# Altium PCB PenguinCrust.PcbDoc
Units mm, origin at the board's own origin, x right, y up, seen from the top; angles counter-clockwise.
Board outline 65 x 56 mm, 2 copper layers (Top Layer, Bottom Layer); 68 components, 89 nets, 344 pads, 42 vias.
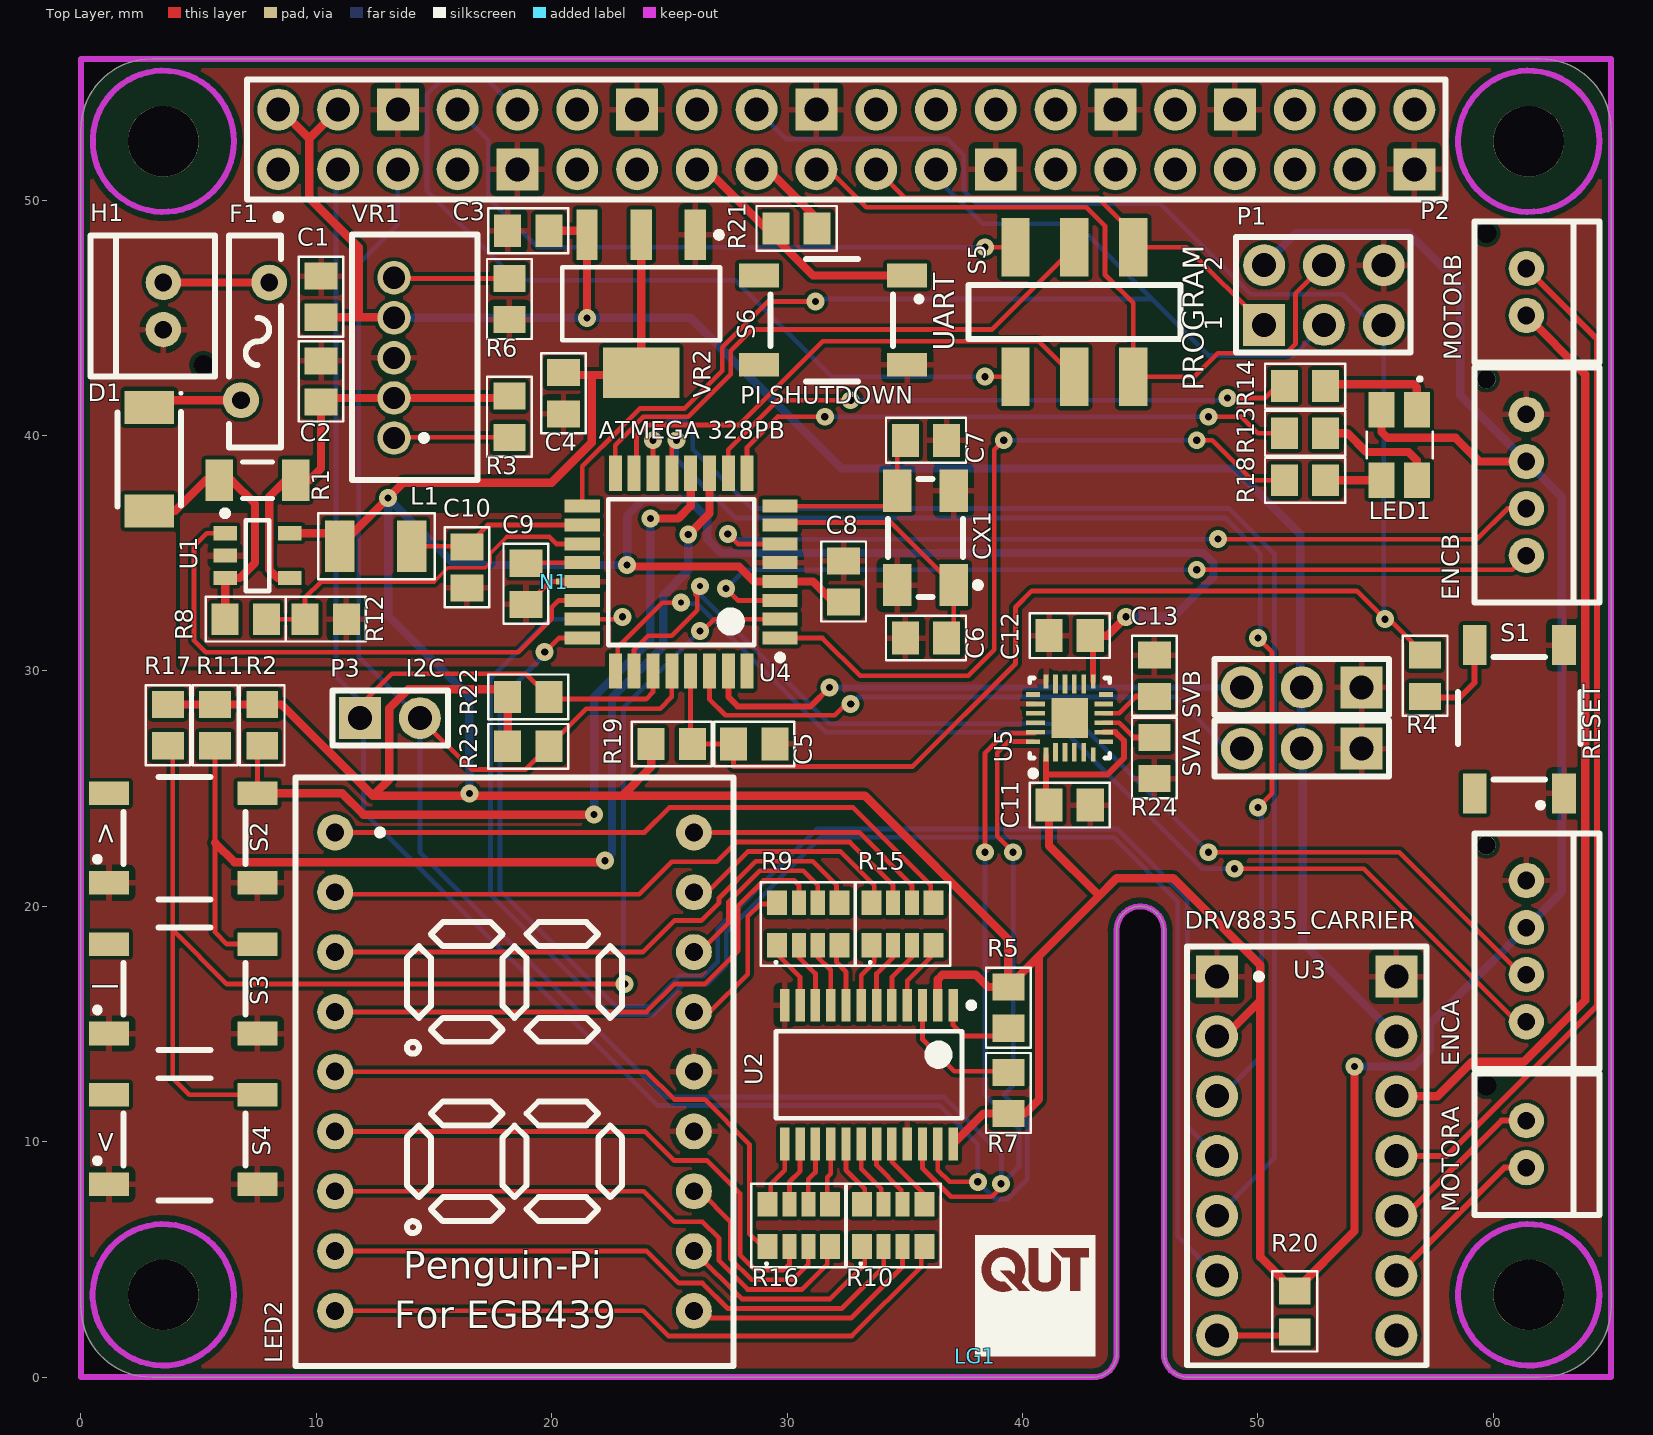
[diagram p0: Top Layer view]
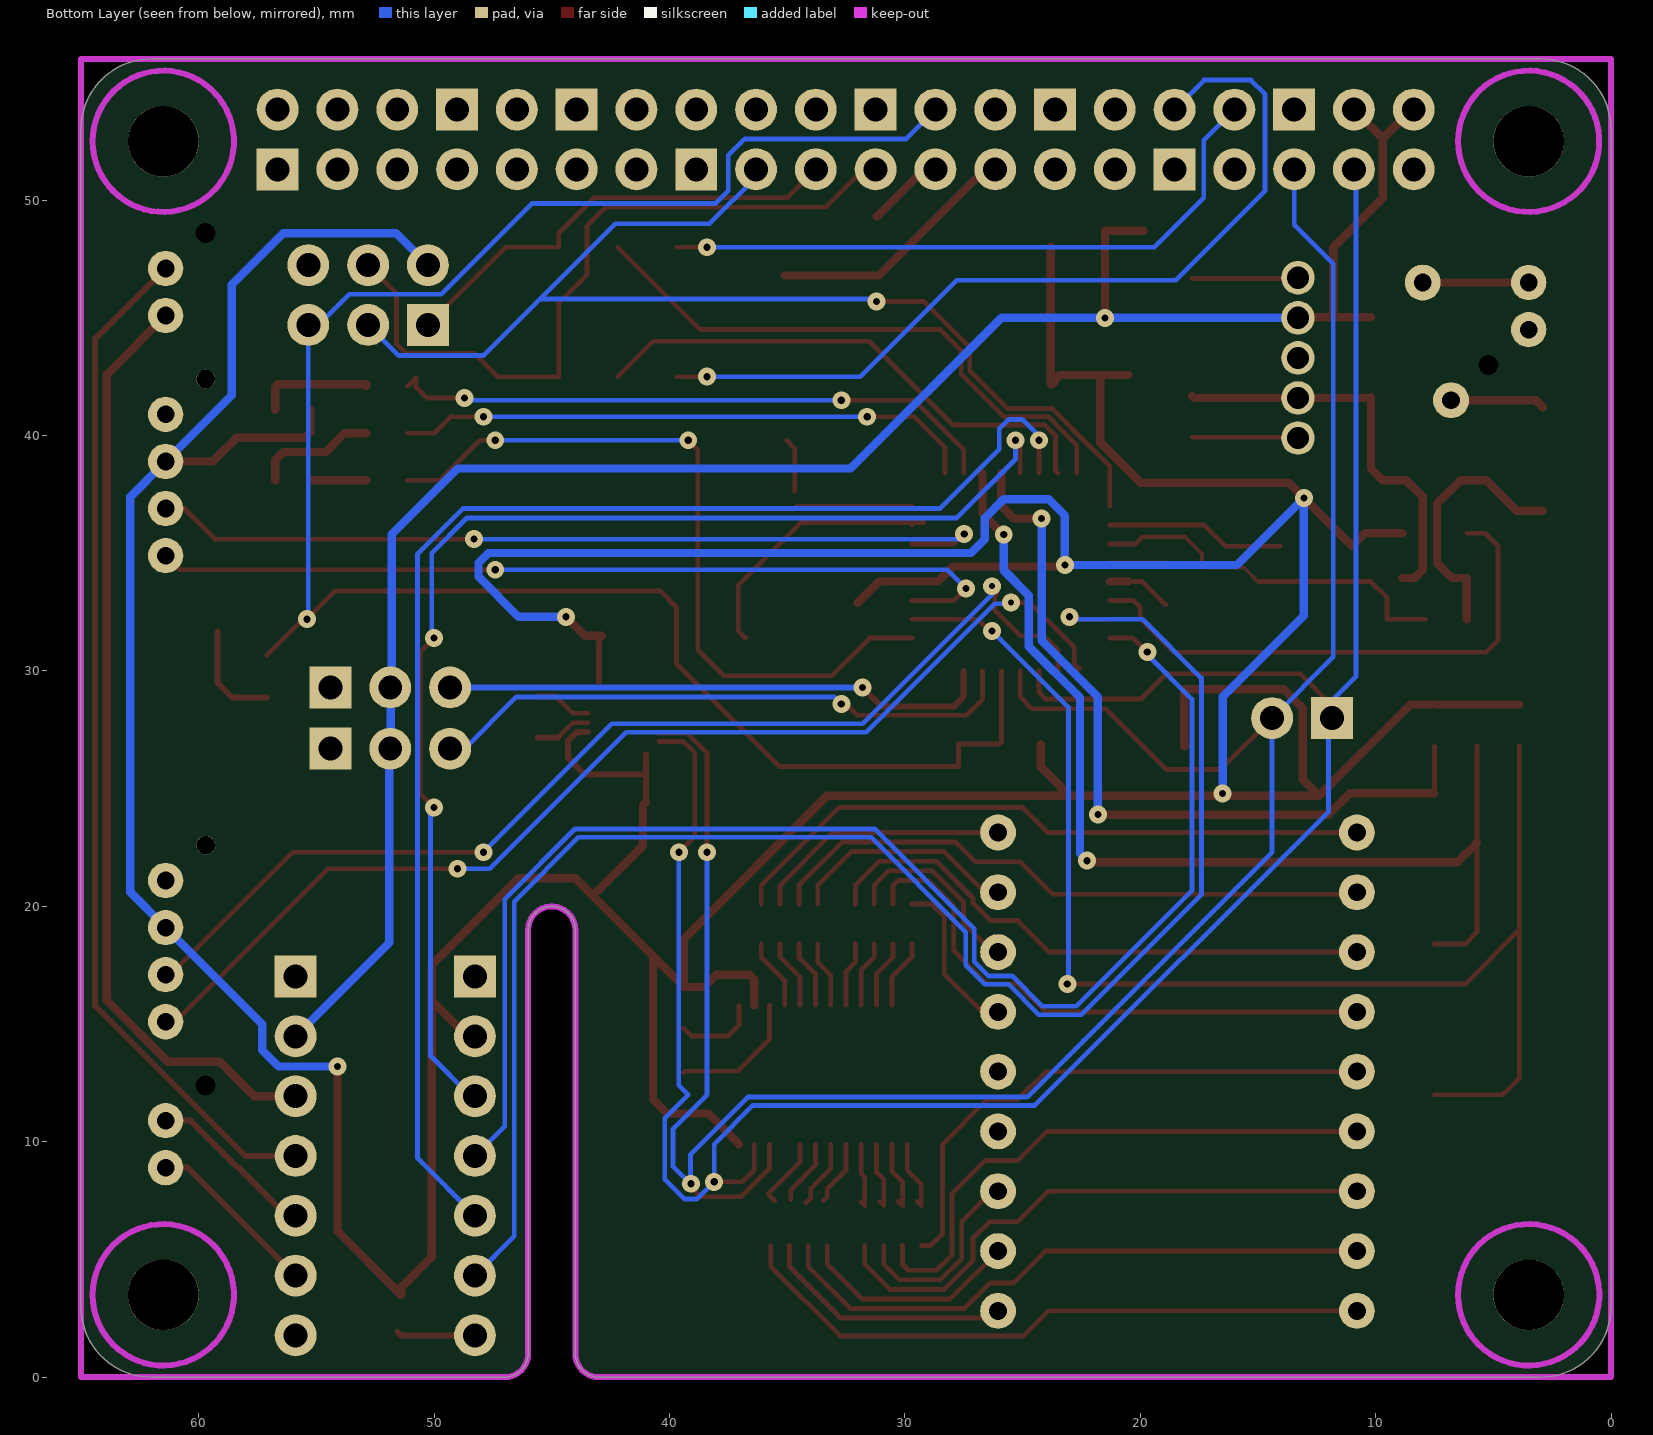
[diagram p1: Bottom Layer view, seen from below]
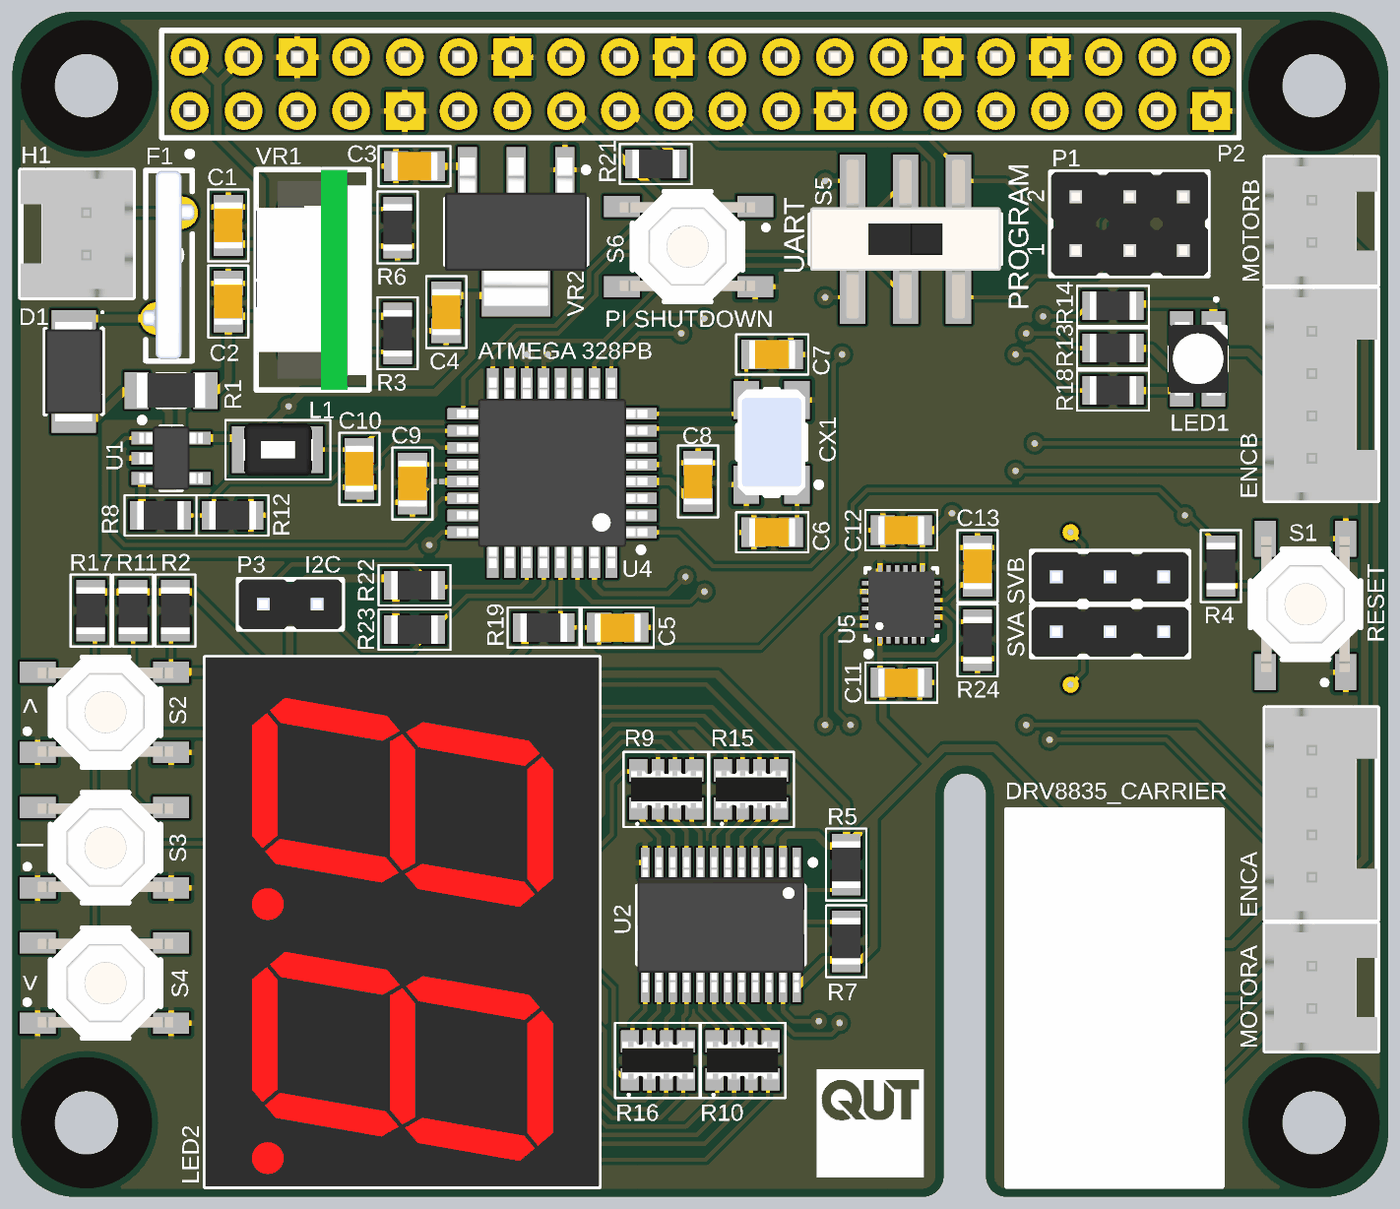
[diagram p2: 3D render of the assembled board from above, using the file's embedded part models]

## Layer stack, top to bottom
Top Solder: solder mask 0.0102, Solder Resist, Dk 3.5
Top Layer: signal copper 0.0356
Dielectric 1: dielectric 0.32, FR-4, Dk 4.8
Bottom Layer: signal copper 0.0356
Bottom Solder: solder mask 0.0102, Solder Resist, Dk 3.5

## Board outline
3,0 cw(c3,3) 0,3 0,53 cw(c3,53) 3,56 62,56 cw(c62,53) 65,53 65,3 cw(c62,3) 62,0 47,0 cw(c47,1) 46,1 46,19 ccw(c45,19) 44,19 44,1 cw(c43,1) 43,0

## Design rules (kind name [scope] priority, off if disabled: settings)
Clearance Clearance_1 [InNamedPolygon('GND_L01_P005') vs OnLayer('Keep-Out Layer')] p1: gap=0.254 ignorepadtopadclearanceinfootprint=FALSE except(0: Arc-Hole Track-Hole SMDPad-Hole THPad-Hole Via-Hole Fill-Hole Poly-Hole Region-Hole Text-Hole)
Clearance [All] p2: gap=0.152 ignorepadtopadclearanceinfootprint=FALSE except(0: Arc-Hole Track-Hole SMDPad-Hole THPad-Hole Via-Hole Fill-Hole Poly-Hole Region-Hole Text-Hole)
ComponentClearance [All] p1: gap=0.254 collisioncheckmode=3 verticalgap=0.254 showdistances=TRUE
HoleSize [All] p1: absolutevalues=TRUE maxlimit=6 minlimit=0.203 maxpercent=80.000 minpercent=20.000
MinimumAnnularRing [All] p1: minimumring=0.15
MinimumSolderMaskSliver [All] p1 off: minsoldermaskwidth=0.125
PolygonConnect [All] p1: connectstyle=Relief reliefconductorwidth=0.254 reliefentries=4 polygonreliefangle="90 Angle" airgapwidth=0.254
RoomDefinition PenguinCrust [InComponentClass('PenguinCrust')] p1: confinementstyle=ConfineIn formatcopy=TRUE lockcomponents=FALSE outline -5.188,-10.268 68.5,-10.268 68.5,59 -5.188,59
RoutingVias [All] p1: holewidth=0.305 width=0.762 viastyle="Through Hole" minholewidth=0.254 minwidth=0.762 maxholewidth=0.762 maxwidth=1.27
SilkToSilkClearance [All] p1 off: silktosilkclearance=0.125
SilkToSolderMaskClearance [IsPad] p1 off: minsilkscreentomaskgap=0.125 clearancetoexposedcopper=TRUE
SolderMaskExpansion [All] p1: expansion=0.102
Width Width_Power [InNetClass('Power')] p1: maxlimit=0.457 minlimit=0.254 preferedwidth=0.356
Width [All] p2: maxlimit=0.508 minlimit=0.152 preferedwidth=0.203
25 further rules are at their usual default settings.

## Classes and differential pairs
net class Power: 3V3 MA1 MA2 MB1 MB2 NetC2_2 NetD1_1 NetD1_2 NetF1_1 VCC

## Components (designator, comment, footprint, x,y, rotation, side; value= is the part's Value field where it differs from the comment)
C1 "CAP SMD" CAPC2012X07N 10.2,45.9 r270 top value=10uF
C2 "CAP SMD" CAPC2012X07N 10.2,42.3 r270 top value=10uF
C3 "CAP SMD" CAPC2012X07N 19,48.7 r0 top value=10uF
C4 "CAP SMD" CAPC2012X07N 20.5,41.8 r90 top value=10uF
C5 "CAP SMD" CAPC2012X07N 28.6,26.9 r180 top value=100nF
C6 "CAP SMD" CAPC2012X07N 35.9,31.4 r0 top value=20pF
C7 "CAP SMD" CAPC2012X07N 35.9,39.8 r180 top value=20pF
C8 "CAP SMD" CAPC2012X07N 32.4,33.8 r270 top value=100nF
C9 "CAP SMD" CAPC2012X07N 18.9,33.7 r90 top value=100nF
C10 "CAP SMD" CAPC2012X07N 16.4,34.4 r90 top value=100nF
C11 "CAP SMD" CAPC2012X07N 42,24.3 r180 top value=10nF
C12 "CAP SMD" CAPC2012X07N 42,31.5 r0 top value=100nF
C13 "CAP SMD" CAPC2012X07N 45.6,29.8 r270 top value=100nF
CX1 "ABM3B" ABM3B_CRYSTAL 37.075,33.65 r90 top value=12MHz
D1 "SMD DIODE" SODFL470X110-2N 2.9,39 r270 top
ENCA "JST-4" B04B-PASK-1 61.4,21.1 r270 top
ENCB "JST-4" B04B-PASK-1 61.4,40.9 r270 top
F1 "RGEF250" PPTC-R14 7.5,44 r270 top
H1 "JST-2" B02B-PASK-1 3.5,44.5 r90 top
L1 "INDUCTOR SMD" CM322522 14.05,35.3 r180 top value=10uH
LED1 "RGB SMD" "RGB SMD" 56,39.6 r270 top
LED2 "7 SEGMENT LED" HDSP-523n 10.8,23.14 r270 top
LG1 "QUT_Logo" QUT_Logo 38,0.9 r0 top
MOTORA "JST-2" B02B-PASK-1 61.4,10.9 r270 top
MOTORB "JST-2" B02B-PASK-1 61.4,47.1 r270 top
N1 "NETTIE" NETTIE-SMD-5mil 20.3,33.8 r180 top net-tie
P1 "Header 3X2" "Header 3x2 nonstandard" 50.26,44.7 r90 top
P2 "RPi Header" "RPI 2 Header" 8.382,51.308 r90 top locked
P3 "I2C" "Header 2" 11.86,28 r0 top
R1 "RES SMD" RESC3216X06M 7.5,38.1 r0 top value=0.05R
R2 "RES SMD" RESC2012X07N 7.7,27.7 r90 top value=10k
R3 "RES SMD" RESC2012X07N 18.2,40.8 r90 top value=10k
R4 "RES SMD" RESC2012X07N 57.1,29.8 r90 top value=330R
R5 "RES SMD" RESC2012X07N 39.4,15.7 r90 top value=10k
R6 "RES SMD" RESC2012X07N 18.2,45.8 r90 top value=298R
R7 "RES SMD" RESC2012X07N 39.4,12.075 r270 top value=10k
R8 "RES SMD" RESC2012X07N 7,32.2 r180 top value=27k
R9 "ARRAY" CAC-80P319X155-8M 30.9,19.25 r90 top value=100
R10 "ARRAY" CAC-80P319X155-8M 34.5,6.45 r90 top value=100
R11 "RES SMD" RESC2012X07N 5.7,27.7 r90 top value=10k
R12 "RES SMD" RESC2012X07N 10.4,32.2 r180 top value=6.8k
R13 "RES SMD" RESC2012X07N 52,40.1 r180 top value=10R
R14 "RES SMD" RESC2012X07N 52,42.1 r180 top value=60R
R15 "ARRAY" CAC-80P319X155-8M 34.9,19.25 r90 top value=100
R16 "ARRAY" CAC-80P319X155-8M 30.5,6.45 r90 top value=100
R17 "RES SMD" RESC2012X07N 3.7,27.7 r90 top value=10k
R18 "RES SMD" RESC2012X07N 52,38.1 r180 top value=10R
R19 "RES SMD" RESC2012X07N 25.1,26.9 r180 top value=10k
R20 "RES SMD" RESC2012X07N 51.562,2.794 r270 top value=10k
R21 "RES SMD" RESC2012X07N 30.4,48.8 r0 top value=10k
R22 "RES SMD" RESC2012X07N 19,28.9 r180 top value=4.7k
R23 "RES SMD" RESC2012X07N 19,26.8 r180 top value=4.7k
R24 "RES SMD" RESC2012X07N 45.6,26.3 r90 top value=10k
S1 "RESET" E-SWITCH-TL3342 63,24.8 r90 top
S2 "B1" E-SWITCH-TL3342 1.2,21 r0 top
S3 "B2" E-SWITCH-TL3342 1.2,14.6 r0 top
S4 "B3" E-SWITCH-TL3342 1.2,8.2 r0 top
S5 "PROGRAM EN" JS202011SCQN_DPDT-SMD-SLIDE 42.2,48 r180 top
S6 "PI SHUTDOWN" E-SWITCH-TL3342 35.1,46.8 r180 top
SVA "Header 3" "Header 3" 54.4,26.7 r180 top
SVB "Header 3" "Header 3" 54.4,29.3 r180 top
U1 "TSC888" SOT95P280X145-5N 7.5,34.9 r0 top
U2 "PCA6416A" TSOP65P640X110-24N 33.475,12.85 r270 top
U3 "DRV8835_CARRIER" DRV8835_CARRIER 48.26,17.018 r0 top
U4 "ATMEGA 328PB" TQFP80P900X900X120-32N 25.5,34.2 r180 top
U5 "MPU-9250" QFN40P300X300X105_HS-25N 42,28 r90 top
VR1 "MURATA_OKR-T3-W12C" MURATA_OKR-Tn 13.3,39.898 r90 top
VR2 "3V3 LDO" SOT230P700X180-4N 23.8,45.6 r270 top

## Footprints (in the part's own frame and the unit in brackets; to place one, negate y for a bottom-side part, rotate by r counter-clockwise, add the part's x,y. Pads: shape width x height; smd on the part's side, far side on the other; paste and mask are expansions set on the pad)
ABM3B_CRYSTAL [mm]
  rect 1.8x1.2 smd: 1(0,0) 2(4,0) 3(4,2.4) 4(0,2.4)
  silkscreen extent -0.5,-1.15 4.5,2.8, body extent -0.5,-0.4 4.5,2.8, height 1.1
B02B-PASK-1 [mm]
  round 1.5 hole 0.75: 1(0,0) 2(2,0)
  round 0.8 hole 0.85 unplated paste+0 mask+0: -(-1.5,-1.7)
  silkscreen extent -2,-2.2 4,3.1, body extent -2,-2.2 4,3.1, height 7.7
B04B-PASK-1 [mm]
  round 1.5 hole 0.75: 1(0,0) 2(2,0) 3(4,0) 4(6,0)
  round 0.8 hole 0.8 unplated paste+0 mask+0: -(-1.5,-1.7)
  silkscreen extent -2,-2.2 8,3.1, body extent -2,-2.2 8,3.1, height 7.7
CAC-80P319X155-8M [mm] "Chip Array, ConvexS, 8-Leads, Pitch 0.80mm,  Body 3.20x1.55mm,  IPC Low Density"
  rect 1.05x0.85 smd: 1(-0.9,1.325) 4(-0.9,-1.325) 5(0.9,-1.325) 8(0.9,1.325)
  rect 1.05x0.6 smd: 2(-0.9,0.4) 3(-0.9,-0.4) 6(0.9,-0.4) 7(0.9,0.4)
  silkscreen extent -1.78,-2.02 1.78,2.02, body extent -0.92,-1.68 0.92,1.68, height 0.7
CAPC2012X07N [mm] "Chip Capacitor, 2-Leads, Body 2.00x1.25mm, IPC Medium Density"
  rect 1.15x1.4 smd: 1(-0.875,0) 2(0.875,0)
  silkscreen extent -1.7,-0.95 1.7,0.95, body extent -1.1,-0.67 1.1,0.67, height 0.7
CM322522 [mm] "BOURNS SMD INDUCTOR"
  rect 1.25x2.2 smd: 1(0,0) 2(3.05,0)
  silkscreen extent -0.97,-1.4 3.98,1.4, body extent -0.15,-1.25 3.15,1.25, height 2.2
DRV8835_CARRIER [mil]
  rect 70x70 hole 40: 1(0,0) 14(300,0)
  round 70 hole 40: 2(0,-100) 3(0,-200) 4(0,-300) 5(0,-400) 6(0,-500) 7(0,-600) 8(300,-600) 9(300,-500) 10(300,-400) 11(300,-300) 12(300,-200) 13(300,-100)
  silkscreen extent -50,-650 350,50, body extent -49,-651 351,49, height 417
E-SWITCH-TL3342 [mm]
  rect 1.7x1 smd: 1(0,0) 2(6.3,0) 3(0,3.8) 4(6.3,3.8)
  silkscreen extent -0.6,-0.7 5.8,4.5, body extent 0,-0.7 6.4,4.5, height 1.54
HDSP-523n [mil]
  round 60 hole 30: 1(0,0) 2(100,0) 3(200,0) 4(300,0) 5(400,0) 6(500,0) 7(600,0) 8(700,0) 9(800,0) 10(800,600) 11(700,600) 12(600,600) 13(500,600) 14(400,600) 15(300,600) 16(200,600) 17(100,600) 18(0,600)
  silkscreen extent -92,-66 892,666, body extent -93,-66 892,666, height 315
"Header 2" [mil]
  rect 70x70 hole 40: 1(0,0)
  round 70 hole 40: 2(100,0)
  silkscreen extent -46,-46 147,46, body extent -46,-46 146,46, height 331
"Header 3" [mil]
  rect 70x70 hole 40: 1(0,0)
  round 70 hole 40: 2(100,0) 3(200,0)
  silkscreen extent -46,-47 246,46, body extent -46,-46 246,46, height 331
"Header 3x2 nonstandard" [mil] "nonstandard, staggered pins"
  rect 70x70 hole 40: 1(0,0)
  round 70 hole 40: 2(100,0) 3(0,-100) 4(100,-100) 5(0,-200) 6(100,-200)
  silkscreen extent -46,-245 147,47, body extent -46,-246 147,47, height 331
JS202011SCQN_DPDT-SMD-SLIDE [mm]
  rect 1.2x2.5 smd: 1(-2.5,0) 2(0,0) 3(2.5,0) 4(-2.5,5.5) 5(0,5.5) 6(2.5,5.5)
  silkscreen extent -4.5,1.6 4.5,3.9, body extent -4.5,-1 4.5,6.5, height 5.5
MURATA_OKR-Tn [mil] "Case C72"
  round 56 hole 37: 1(0,0) 2(67,0) 3(134,0) 4(201,0) 5(268,0)
  silkscreen extent -70,-140 340,70, body extent -70,-140 340,70, height 651
NETTIE-SMD-5mil [mil]
  rect 10x10 smd paste+0 mask+0: 1(0,0) 2(14.76,0)
  Top Layer lines w7.87: 13.78,0 0.98,0
PPTC-R14 [mil]
  round 60 hole 30: 1(-98.43,19.69) 2(98.43,-27.56)
  silkscreen extent -177,-47 177,39, body extent -176,-53 174,43, height 472
QFN40P300X300X105_HS-25N [mm] "QFN, 24-Leads, Body 3.00x3.00mm, Pitch 0.40mm, Thermal Pad 1.70x1.54mm, IPC Medium Density"
  rect 1.7x1.54 smd: 0(0,0)
  rect 0.6x0.2 smd: 1(-1.55,1) 6(-1.55,-1) 13(1.55,-1) 18(1.55,1)
  rect 0.8x0.2 smd: 2(-1.45,0.6) 3(-1.45,0.2) 4(-1.45,-0.2) 5(-1.45,-0.6) 14(1.45,-0.6) 15(1.45,-0.2) 16(1.45,0.2) 17(1.45,0.6)
  rect 0.2x0.6 smd: 7(-1,-1.55) 12(1,-1.55) 19(1,1.55) 24(-1,1.55)
  rect 0.2x0.8 smd: 8(-0.6,-1.45) 9(-0.2,-1.45) 10(0.2,-1.45) 11(0.6,-1.45) 20(0.6,1.45) 21(0.2,1.45) 22(-0.2,1.45) 23(-0.6,1.45)
  silkscreen extent -2.47,-1.7 1.7,1.7, body extent -1.57,-1.57 1.57,1.57, height 1.05
QUT_Logo [mm]
  silkscreen extent 0,0.01 5.08,5.12
RESC2012X07N [mm] "Chip Resistor, 2-Leads, Body 2.00x1.25mm, IPC Medium Density"
  rect 1.15x1.35 smd: 1(-0.875,0) 2(0.875,0)
  silkscreen extent -1.7,-0.95 1.7,0.95, body extent -1.1,-0.67 1.1,0.67, height 0.7
RESC3216X06M [mm] "Chip Resistor, 2-Leads, Body 3.20x1.60mm, IPC Low Density"
  rect 1.15x1.75 smd: 1(-1.625,0) 2(1.625,0)
  silkscreen extent -0.65,-0.77 0.65,0.77, body extent -1.61,-0.81 1.61,0.81, height 0.62
"RGB SMD" [mm] "WL-SFTW"
  rect 1.5x1.1 smd: 1(-1.5,0.75) 2(1.5,0.75) 3(1.5,-0.75) 4(-1.5,-0.75)
  silkscreen extent -2.83,-1.38 0.58,1.43, body extent -1.75,-1.38 1.75,1.43, height 2.05
"RPI 2 Header" [mil]
  round 70 hole 40: 1(0,0) 2(100,0) 3(0,-100) 4(100,-100) 5(0,-200) 7(0,-300) 8(100,-300) 10(100,-400) 11(0,-500) 12(100,-500) 13(0,-600) 15(0,-700) 16(100,-700) 17(0,-800) 18(100,-800) 19(0,-900) 21(0,-1000) 22(100,-1000) 23(0,-1100) 24(100,-1100) 26(100,-1200) 27(0,-1300) 28(100,-1300) 29(0,-1400) 31(0,-1500) 32(100,-1500) 33(0,-1600) 35(0,-1700) 36(100,-1700) 37(0,-1800) 38(100,-1800) 40(100,-1900)
  rect 70x70 hole 40: 6(100,-200) 9(0,-400) 14(100,-600) 20(100,-900) 25(0,-1200) 34(100,-1600) 39(0,-1900)
  rect 70x70 hole 40 mask+4: 30(100,-1400)
  silkscreen extent -85,-1952 150,52, body extent -48,-1954 149,54, height 374
SODFL470X110-2N [mm] "SODFL, 2-Leads, Body 2.50x4.70mm, IPC Medium Density"
  rect 1.4x2.1 smd: 1(-2.2,0) 2(2.2,0)
  silkscreen extent -2.85,-1.35 2.01,1.4, body extent -2.35,-1.35 2.35,1.35, height 1.1
SOT95P280X145-5N [mm] "SOT23, 5-Leads, Body 2.90x2.80mm, Pitch 0.95mm, IPC Medium Density"
  rect 1x0.6 smd: 1(-1.375,0.95) 2(-1.375,0) 3(-1.375,-0.95) 4(1.375,-0.95) 5(1.375,0.95)
  silkscreen extent -1.5,-1.5 0.5,1.92, body extent -1.5,-1.5 1.5,1.5, height 1.45
SOT230P700X180-4N [mm] "SOT223, 4-Leads, Body 6.50x7.00mm (avg), Pitch 2.30mm, IPC Medium Density"
  rect 2.15x0.9 smd: 1(-2.925,2.3) 2(-2.925,0) 3(-2.925,-2.3)
  rect 2.15x3.25 smd: 2(2.925,0)
  silkscreen extent -3.05,-3.35 1.55,3.43, body extent -3.5,-3.35 3.5,3.35, height 1.8
TQFP80P900X900X120-32N [mm] "TQFP, 32-Leads, Body 7.00x7.00mm, Pitch 0.80mm, IPC Medium Density"
  rect 1.5x0.55 smd: 1(-4.2,2.8) 2(-4.2,2) 3(-4.2,1.2) 4(-4.2,0.4) 5(-4.2,-0.4) 6(-4.2,-1.2) 7(-4.2,-2) 8(-4.2,-2.8) 17(4.2,-2.8) 18(4.2,-2) 19(4.2,-1.2) 20(4.2,-0.4) 21(4.2,0.4) 22(4.2,1.2) 23(4.2,2) 24(4.2,2.8)
  rect 0.55x1.5 smd: 9(-2.8,-4.2) 10(-2,-4.2) 11(-1.2,-4.2) 12(-0.4,-4.2) 13(0.4,-4.2) 14(1.2,-4.2) 15(2,-4.2) 16(2.8,-4.2) 25(2.8,4.2) 26(2,4.2) 27(1.2,4.2) 28(0.4,4.2) 29(-0.4,4.2) 30(-1.2,4.2) 31(-2,4.2) 32(-2.8,4.2)
  silkscreen extent -4.33,-3.1 3.1,3.75, body extent -4.5,-4.5 4.5,4.5, height 1.2
TSOP65P640X110-24N [mm] "TSOP, 24-Leads, Body 7.80x4.40mm, Pitch 0.65mm, IPC Medium Density"
  rect 1.4x0.4 smd: 1(-2.95,3.575) 2(-2.95,2.925) 3(-2.95,2.275) 4(-2.95,1.625) 5(-2.95,0.975) 6(-2.95,0.325) 7(-2.95,-0.325) 8(-2.95,-0.975) 9(-2.95,-1.625) 10(-2.95,-2.275) 11(-2.95,-2.925) 12(-2.95,-3.575) 13(2.95,-3.575) 14(2.95,-2.925) 15(2.95,-2.275) 16(2.95,-1.625) 17(2.95,-0.975) 18(2.95,-0.325) 19(2.95,0.325) 20(2.95,0.975) 21(2.95,1.625) 22(2.95,2.275) 23(2.95,2.925) 24(2.95,3.575)
  silkscreen extent -3.07,-3.95 1.85,4.47, body extent -3.2,-3.95 3.2,3.95, height 1.1

## Part data
C1 C2 C3 C4 C5 C6 C7 C8 C9 C10 C11 C12 C13: "Surface mount capacitor"
CX1: library part ABM3B_CRYSTAL, "Surface Mount Crystal Oscillator"
D1: "Surface mount Diode"
ENCA ENCB: library part B04B-PASK-1, "4 pin Top Entry JST header"
F1: "PPTC Thermal Fuse", Hold Current=2.5A, Trip Current=4.7A, VRating=16V
H1 MOTORA MOTORB: library part B02B-PASK-1, "2 pin Top Entry JST header"
L1: "Surface Mount Inductor - varying sizes"
LED1: "ASMB-MTB1-0A3A2"
LED2: library part HDSP-523n, "Double digit 7 segment LED-through hole"
P1: library part "Header 3x2 Staggered", "3 by 2 header, staggered pin arrangement"
P2: library part "RPi 2 Header", "GPIO connector for Raspberry Pi Microcomputer"
P3: library part "Header 2", "2 pin header"
R1 R2 R3 R4 R5 R6 R7 R8 R11 R12 R13 R14 R17 R18 R19 R20 R21 R22 R23 R24: "0805 surface mount resistor"
R9 R10 R15 R16: library part RES-ARRAY, "Surface mount resistor array"
S1 S2 S3 S4 S6: library part E-SWITCH-PUSHBUTTON, "TL 3342 surface mount pushbutton"
S5: library part JS202011SCQN_DPDT-SMD-SLIDE, "DPDT Slide switch"
SVA SVB: "3 pin header"
U1: "Curent Sense Amplifier"
U2: library part PCA6416APW, "Low-voltage translating 16-bit I2C I/O port expander"
U3: "DRV8835 Motor Controller"
U4: "32 pin Microcontroller"
U5: "6 axis IMU"
VR1: "5V 3A switching voltage regulator"
VR2: "3.3 V Low Dropout Regulator"

## Free pads (board coordinates)
  round 3 hole 3 unplated mask+1.6: 0(3.5,3.5) 1(61.5,3.5) 2(61.5,52.5) 3(3.5,52.5)

## Via types
v1: diameter 0.762, hole 0.305, Top Layer to Bottom Layer, tented both sides, 38 vias
v2: diameter 0.762, hole 0.305, Top Layer to Bottom Layer, 2 vias
v3: diameter 0.762, hole 0.254, Top Layer to Bottom Layer, tented both sides, 2 vias

## Nets (pads, with @x,y where several pads share a name; then routed paths per layer and width w, separated by ;. In a path a pad name is that pad's centre, name@x,y a point inside that pad or via, vN(x,y) a via of type N, cw(c..) or ccw(c..) an arc to the next point about the centre after c; other vN are vias at no path point)
3V3: C4.2 C8.2 C11.2 C12.2 ENCA.2 ENCB.2 L1.2 LED1.4 P1.2 R2.2 R5.2 R7.2 R11.2 R17.2 R19.2 R20.1 R22.2 R23.2 U1.5 U2.2 U2.24 U3.2 U4.4 U5.1 U5.8 U5.13 VR2.2 | length 282.6
  Top Layer w0.254: C11.2@41,24.425 41,25.6 ; U5.1 41,25.6 ; U5.13 C12.2@43,31.375 ; U5.8 43.945,27.4 44.3,27.045 44.3,26.3 43.6,25.6 41,25.6
  Top Layer w0.356: R17.2@3.9,28.575 R11.2 R2.2@7.475,28.575 ; R2.2 8.525,28.575 12.4,24.7 16.4,24.7 v1(16.5,24.8) 16.6,24.7 23,24.7 ; U1.5 10.45,35.85 L1.2 v1(13.05,37.35) 13.7,38 20,38 21.7,39.7 21.7,42.575 ; 12.5,24.8 13.1,25.4 13.1,28.424 13.895,29.219 18.125,29.219 R22.2 ; R23.2@18.068,26.857 R23.2 R22.2@18.125,28.7 ; C4.2@20.5,42.575 21.7,42.575 ; v1(23.2,34.5) 23.262,34.438 27.962,34.438 28.6,33.8 U4.4 31.1,33.8 C8.2@32,32.9 ; VR2.2@23.8,48.025 23.8,42.675 23.8,42.175 23.708,42.193 23.513,42.48 23.448,42.575 21.7,42.575 ; R19.2 24.225,25.925 23,24.7 ; U2.2 36.4,16.9 36.6,17.1 38,17.1 38.525,16.575 R5.2 R5.2@39.4,16.6 ; U2.24 38.35,11.2 R7.2 40.1,11.2 40.7,11.8 40.7,17.9 ; C11.2@41,24.425 C11.2 41.125,22.575 43.2,20.5 43.2,20.4 ; C12.2@43,31.375 C12.2 43.6,31.5 v1(44.4,32.3) ; U3.2 48.26,14.16 50.1,16 ; v1(54.1,13.2) 54.1,6.207 R20.1 51.393,3.5 51.393,3.807 50.1,5.1 50.1,16 ; LED1.4 55.25,40.15 55.5,39.9 58.4,39.9 59.4,38.9 ENCB.2 ; 23,24.7 33.3,24.7 39.4,18.6 R5.2@39.4,16.6 ; R5.2@39.4,16.6 40.7,17.9 ; 40.7,17.9 43.2,20.4 ; 43.2,20.4 44,21.2 46.4,21.2 50.1,17.5 50.1,16
  Bottom Layer w0.356: v1(16.5,24.8) 16.5,28.9 13.05,32.35 v1(13.05,37.35) 15.9,34.5 v1(23.2,34.5) 23.2,36.6 23.9,37.3 25.8,37.3 26.6,36.5 26.6,35.6 27.189,35.011 47.695,35.011 48.111,34.595 48.111,34.005 46.406,32.3 v1(44.4,32.3) ; P1.2 51.62,48.6 56.4,48.6 58.6,46.4 58.6,41.7 ENCB.2 62.9,37.4 62.9,20.6 ENCA.2 57.3,15 57.3,13.9 56.6,13.2 v1(54.1,13.2)
BTN1: R2.1 S2.4 U4.12 | length 33.6
  Top Layer w0.203: S2.4 R2.1@7.5,26.8
  Top Layer w0.356: S2.4 11.1,24.8 12,23.9 v1(21.8,23.9) ; v1(24.196,36.475) 25.376,36.475 25.9,37 U4.12
  Bottom Layer w0.356: v1(21.8,23.9) 21.8,28.9 24.179,31.279 24.179,36.458 v1(24.196,36.475)
BTN2: R11.1 S3.4 U4.11 | length 45.3
  Top Layer w0.203: R11.1 5.7,22.7 5.7,18.9 6.2,18.4 S3.4
  Top Layer w0.356: 5.7,22.7 6.519,21.881 22.319,21.881 v1(22.259,21.941) ; v1(25.8,35.8) 25.819,35.8 26.7,36.681 U4.11
  Bottom Layer w0.356: v1(22.259,21.941) 22.562,22.244 22.562,28.872 24.738,31.048 24.738,33.216 25.8,34.278 v1(25.8,35.8)
BTN3: R17.1 S4.4 U4.2 | length 58.1
  Top Layer w0.203: R17.1@3.9,26.825 3.9,19 ; S4.4 4.6,12 3.9,12.7 3.9,19 ; v1(23.1,16.7) 6.2,16.7 3.9,19 ; v1(26.3,31.7) 26.4,31.7 26.9,32.2 U4.2
  Bottom Layer w0.203: v1(23.1,16.7) 23.045,16.755 23.045,28.445 v1(26.3,31.7)
CSENSE: U1.1 U4.22 | length 23.5
  Top Layer w0.203: U1.1 5.35,35.85 4.8,35.3 4.8,31.3 5.3,30.8 18.581,30.8 20,32.219 20,32.7 20.3,33 U4.22
ENCA1: ENCA.4 U4.25 | length 47.9
  Top Layer w0.203: U4.25 22.6,30.1 22.8,30.3 22.8,31 24.7,32.9 v3(25.5,32.9) ; v1(49,21.6) 54.5,21.6 61,15.1 ENCA.4
  Bottom Layer w0.203: v3(25.5,32.9) 25.5,32.86 26.182,32.86 31.642,27.4 41.83,27.4 47.63,21.6 v1(49,21.6)
ENCA2: ENCA.3 U4.26 | length 47.7
  Top Layer w0.203: U4.26 23.5,30.9 24.1,31.5 25.1,31.5 26.186,32.586 26.186,33.184 26.1,33.27 26.1,33.6 v3(26.3,33.6) ; v1(47.9,22.3) 56,22.3 61.2,17.1 ENCA.3
  Bottom Layer w0.203: v3(26.3,33.6) 26.3,33.245 31.789,27.756 42.444,27.756 v1(47.9,22.3)
ENCB1: ENCB.4 U4.3 | length 37.1
  Top Layer w0.203: v1(27.4,33.5) 27.9,33 U4.3 ; v1(47.4,34.3) 60.8,34.3 ENCB.4
  Bottom Layer w0.203: v1(27.4,33.5) 28.2,34.3 v1(47.4,34.3)
ENCB2: ENCB.3 U4.6 | length 36.9
  Top Layer w0.203: v1(27.48,35.822) 27.903,35.4 U4.6 ; v1(48.3,35.6) 59.3,35.6 60.6,36.9 ENCB.3
  Bottom Layer w0.203: v1(27.48,35.822) 27.48,35.82 27.7,35.6 v1(48.3,35.6)
GND: C1.1 C2.1 C3.1 C4.1 C5.1 C6.1 C7.1 C8.1 C11.1 C12.1 C13.1 CX1.2 CX1.4 ENCA.1 ENCB.1 H1.1 LED2.13 LED2.14 N1.1 P1.6 P2.6 P2.9 P2.14 P2.20 P2.25 P2.30 P2.34 P2.39 R6.1 R24.1 S1.1 S1.2 S2.1 S2.2 S3.1 S3.2 S4.1 S4.2 S6.3 SVA.1 SVB.1 U2.12 U2.21 U3.1 U3.14 U4.5 U4.21 U5.18 U5.20 VR1.3 VR2.1 | length 0.8
  Top Layer w0.356: 20.5,33.8 U4.21
LED2-1A: LED2.16 R9.6 | length 8.3
  Top Layer w0.203: LED2.16 26.26,18.06 27.513,19.313 27.513,20.188 28.84,21.514 30.686,21.514 31.3,20.9 R9.6 R9.6@31.3,20.1
LED2-1B: LED2.15 R9.8 | length 7
  Top Layer w0.203: LED2.15 26.72,15.52 28.326,17.126 28.326,19.577 28.849,20.1 R9.8@29.7,20.1
LED2-1C: LED2.3 R9.5 | length 24.2
  Top Layer w0.203: LED2.3 23.86,18.06 25.2,19.4 26.349,19.4 27.107,20.158 27.107,20.356 28.671,21.921 31.079,21.921 32.1,20.9 R9.5@32.1,20.1
LED2-1D: LED2.2 R15.7 | length 26.2
  Top Layer w0.203: LED2.2 10.886,20.514 23.714,20.514 25.1,21.9 27,21.9 27.834,22.734 32.666,22.734 34.5,20.9 R15.7 R15.7@34.5,20.1
LED2-1DP: LED2.4 R9.7 | length 24
  Top Layer w0.203: LED2.4 24.02,15.52 25.2,16.7 26.5,16.7 27.92,18.12 27.92,20.02 29,21.1 30.3,21.1 30.5,20.9 R9.7 R9.7@30.5,20.1
LED2-1E: LED2.1 R15.5 | length 27.9
  Top Layer w0.203: LED2.1 23.94,23.14 25.007,24.207 32.793,24.207 36.1,20.9 R15.5@36.1,20.1
LED2-1F: LED2.18 R15.6 | length 11
  Top Layer w0.203: LED2.18 33.06,23.14 35.3,20.9 R15.6 R15.6@35.3,20.1
LED2-1G: LED2.17 R15.8 | length 9.8
  Top Layer w0.203: LED2.17 26.6,20.6 28.327,22.327 32.273,22.327 33.7,20.9 R15.8@33.7,20.1
LED2-2A: LED2.11 R10.1 | length 9.5
  Top Layer w0.203: LED2.11 28.075,3.325 31.825,3.325 33.3,4.8 R10.1@33.3,5.6
LED2-2B: LED2.10 R10.3 | length 10.8
  Top Layer w0.203: LED2.10 26.38,2.82 26.687,2.513 32.713,2.513 34.9,4.7 R10.3 R10.3@34.9,5.6
LED2-2C: LED2.8 R10.2 | length 25.9
  Top Layer w0.203: LED2.8 24.04,5.36 25.4,4 26.4,4 27.481,2.919 32.319,2.919 34.1,4.7 R10.2 R10.2@34.1,5.6
LED2-2D: LED2.6 R16.2 | length 24.2
  Top Layer w0.203: LED2.6 23.96,10.44 25.2,9.2 26.6,9.2 27.994,7.806 27.994,5.206 28.655,4.545 29.845,4.545 30.1,4.8 R16.2 R16.2@30.1,5.6
LED2-2DP: LED2.9 R10.4 | length 27.5
  Top Layer w0.203: LED2.9 23.88,2.82 24.947,1.753 32.753,1.753 35.7,4.7 R10.4@35.7,5.6
LED2-2E: LED2.5 R16.1 | length 23.8
  Top Layer w0.203: LED2.5 24.02,12.98 25.2,11.8 26.5,11.8 28.4,9.9 28.4,6.1 28.9,5.6 R16.1@29.3,5.6
LED2-2F: LED2.12 R16.3 | length 8.4
  Top Layer w0.203: LED2.12 26.3,7.9 27.587,6.613 27.587,5.038 28.487,4.138 30.238,4.138 30.9,4.8 R16.3 R16.3@30.9,5.6
LED2-2G: LED2.7 R16.4 | length 24.4
  Top Layer w0.203: LED2.7 23.9,7.9 25.2,6.6 26.4,6.6 27.107,5.893 27.107,4.944 28.319,3.732 30.632,3.732 31.7,4.8 R16.4@31.7,5.6
LED-B: R18.2 U4.1 | length 31.9
  Top Layer w0.203: U4.1 31.5,31.4 33.1,29.8 37.7,29.8 38.8,30.9 38.8,39.4 v1(39.2,39.8) ; v1(47.4,39.8) 48.061,39.8 49.761,38.1 R18.2
  Bottom Layer w0.203: v1(39.2,39.8) v1(47.4,39.8)
LED-G: R13.2 U4.9 | length 24.8
  Top Layer w0.203: U4.9 28.3,39.5 29.606,40.806 29.613,40.8 v1(31.6,40.8) ; v1(47.9,40.8) 49.287,40.8 49.294,40.806 50,40.1 R13.2
  Bottom Layer w0.203: v1@31.6,40.8 v1@47.9,40.8
LED-R: R14.2 U4.10 | length 26.3
  Top Layer w0.203: U4.10 27.5,39.4 29.6,41.5 v1(32.7,41.5) ; v1(48.7,41.6) 50.3,41.6 50.762,42.062 50.762,42.1 50.762,42.463 R14.2
  Bottom Layer w0.203: v1(32.7,41.5) 48.6,41.5 v1(48.7,41.6)
MA1: MOTORA.2 U3.9 | length 7.4
  Top Layer w0.254: U3.9 60.462,8.9 MOTORA.2
MA2: MOTORA.1 U3.10 | length 7.2
  Top Layer w0.254: U3.10 56.258,6.858 58.341,8.941 58.387,8.941 60.347,10.9 MOTORA.1
MAPH: U3.6 U4.23 | length 70.6
  Top Layer w0.203: U4.23 22.9,32.2 v1(23,32.3)
  Bottom Layer w0.203: v1(23,32.3) 22.9,32.2 19.9,32.2 17.4,29.7 17.4,20.5 22.5,15.4 24.303,15.4 25.591,16.688 26.608,16.688 27.412,17.492 27.412,18.912 31.435,22.935 43.865,22.935 46.594,20.206 46.594,5.984 U3.6
MAPWM: U3.5 U4.14 | length 60.3
  Top Layer w0.203: U4.14 v1(24.3,39.8)
  Bottom Layer w0.203: v1(24.3,39.8) 24.3,39.97 25.016,40.686 25.584,40.686 25.986,40.284 25.986,39.414 28.494,36.906 48.768,36.906 50.7,34.975 50.7,9.298 U3.5
MB1: MOTORB.1 U3.11 | length 43.7
  Top Layer w0.254: U3.11 58.016,9.398 64.408,15.79 64.408,44.092 MOTORB.1
MB2: MOTORB.2 U3.12 | length 39.8
  Top Layer w0.356: U3.12 57.638,11.938 59.1,13.4 61.299,13.4 63.9,16.001 63.9,42.6 MOTORB.2
MBPH: U3.4 U4.24 | length 60.6
  Top Layer w0.203: v1(19.7,30.8) 20.3,31.4 U4.24
  Bottom Layer w0.203: v1(19.7,30.8) 19.7,30.7 17.806,28.806 17.806,20.668 22.719,15.756 24.156,15.756 25.444,17.044 26.461,17.044 27.056,17.639 27.056,19.059 31.288,23.291 44.012,23.291 47,20.303 47,10.658 U3.4
MBPWM: U3.3 U4.13 | length 53.5
  Top Layer w0.203: U4.13 25.1,39.8 v1(25.3,39.8) ; v2(50,24.2) 50.6,24.8 50.6,30.8 v2(50,31.4)
  Bottom Layer w0.203: v1(25.3,39.8) 25.3,39 27.8,36.5 48.6,36.5 50.1,35 50.1,31.5 v2(50,31.4) ; U3.3 48.438,11.938 50.15,13.65 50.15,24.15 50.1,24.2 v2(50,24.2)
MISO: S5.2 U4.16 | length 24.8
  Top Layer w0.203: U4.16 22.7,39.586 23.309,40.196 23.309,40.21 23.89,40.791 23.904,40.791 23.914,40.8 25.8,40.8 27.6,42.6 27.6,43.6 28.5,44.5 38.7,44.5 S5.2
MISO_ISP: P1.1 P2.21 S5.1 | length 19.6
  Top Layer w0.203: P2.21 34.99,50.1 43.2,50.1 44.7,48.6 S5.1 46.96,48 P1.1
MOSI: S5.5 U4.15 | length 22.5
  Top Layer w0.203: U4.15 23.6,38.5 23.6,39.984 23.665,40.049 23.665,40.063 24.037,40.435 24.051,40.435 24.061,40.444 27.954,40.444 31.513,44.004 40.696,44.004 S5.5
MOSI_ISP: P1.4 P2.19 S5.4 | length 31.5
  Top Layer w0.203: P2.19 31.753,51.308 33.361,49.7 42.709,49.7 43.5,48.909 43.5,46.842 44.7,45.642 S5.4 47.3,42.5 48.3,43.5 51.2,43.5 51.6,43.9 51.6,46.04 P1.4
NetC2_2: C2.2 R1.2 R3.2 U1.4 VR1.2 | length 17.5
  Top Layer w0.356: U1.4 8.35,33.95 7.994,34.306 7.994,37.394 8.7,38.1 R1.2 9.7,38.1 10.2,38.6 C2.2 10.2,41.625 10.227,41.598 17.723,41.598 R3.2@17.8,41.675
NetC6_2: C6.2 CX1.1 U4.7 | length 11.5
  Top Layer w0.203: U4.7@29.2,36.306 U4.7@29.7,36.306 ; U4.7 U4.7@29.7,36.306 ; C6.2 37.075,31.7 CX1.1 34.419,36.306 U4.7@29.7,36.306
NetC7_2: C7.2 CX1.3 U4.8 | length 7.2
  Top Layer w0.203: U4.8 CX1.3@34.6,37 ; CX1.3 34.675,39.45 C7.2
NetC9_2: C9.2 U4.20 | length 2.4
  Top Layer w0.203: C9.2 18.925,34.6 U4.20
NetC10_2: C10.2 L1.1 U4.18 | length 7.6
  Top Layer w0.203: L1.1 16.375,35.3 17.275,36.2 U4.18
NetC13_2: C13.2 U5.10 | length 2.5
  Top Layer w0.2: U5.10 44.1,28.2 44.825,28.925
  Top Layer w0.254: 44.825,28.925 C13.2
NetD1_1: D1.1 F1.2 | length 4
  Top Layer w0.356: D1.1 3.2,41.5 F1.2
NetD1_2: D1.2 R1.1 R8.2 U1.3 | length 11.2
  Top Layer w0.356: D1.2 4,36.8 5.3,38.1 R1.1 6.4,38.1 7.394,37.106 7.394,34.594 6.75,33.95 U1.3 R8.2
NetF1_1: F1.1 H1.2 | length 4.5
  Top Layer w0.356: H1.2 F1.1
NetLED1_1: LED1.1 R14.1 | length 5
  Top Layer w0.356: R14.1 52.875,42.18 56.62,42.18 56.75,42.05 LED1.1
NetLED1_2: LED1.2 R13.1 | length 5.2
  Top Layer w0.356: R13.1 53.8,40.1 54.6,39.3 56.4,39.3 56.75,38.95 LED1.2
NetLED1_3: LED1.3 R18.1 | length 2.4
  Top Layer w0.356: R18.1 LED1.3
NetP2_15: P2.15 R21.1 S6.1 | length 10.8
  Top Layer w0.356: P2.15 26.592,51.308 31.1,46.8 S6.1
NetP2_17: P2.17 R21.2 | length 3.3
  Top Layer w0.356: P2.17 29.192,51.308 R21.2@31.187,49.312
NetR3_1: R3.1 VR1.1 | length 4.7
  Top Layer w0.203: VR1.1@13.1,39.896 13.129,39.925 R3.1@17.8,39.925
NetR4_1: R4.1 S1.4 | length 4.5
  Top Layer w0.254: R4.1@57.1,28.875 58.575,28.875 59.2,29.5 S1.4 S1.4@59.2,31.675
NetR5_1: R5.1 U2.1 | length 3.5
  Top Layer w0.203: U2.1 37.05,14.95 37.5,14.5 39.075,14.5 R5.1
NetR6_2: R6.2 VR1.5 | length 4.7
  Top Layer w0.203: VR1.5@13.1,46.704 13.129,46.675 R6.2@17.8,46.675
NetR7_1: R7.1 U2.3 | length 5.7
  Top Layer w0.203: U2.3 35.75,14.35 37.1,13 39.35,13 R7.1
NetR9_1: R9.1 U2.11 | length 3
  Top Layer w0.203: R9.1@29.7,18.4 29.7,17.848 30.55,16.998 U2.11
NetR9_2: R9.2 U2.10 | length 2.9
  Top Layer w0.203: R9.2@30.5,18.4 R9.2 30.5,17.848 31.2,17.148 U2.10
NetR9_3: R9.3 U2.9 | length 2.8
  Top Layer w0.203: R9.3@31.3,18.4 R9.3 31.3,17.848 31.85,17.298 U2.9
NetR9_4: R9.4 U2.8 | length 2.8
  Top Layer w0.203: R9.4@32.1,18.4 32.1,17.623 32.5,17.223 U2.8
NetR10_5: R10.5 U2.20 | length 3.1
  Top Layer w0.203: U2.20 34.45,9.15 35.8,7.8 35.8,7.77 R10.5@35.53,7.5
NetR10_6: R10.6 U2.19 | length 2.8
  Top Layer w0.203: U2.19 33.8,9 34.85,7.95 R10.6@34.85,7.55
NetR10_7: R10.7 U2.18 | length 2.9
  Top Layer w0.203: U2.18 33.15,8.85 34,8 34,7.6 R10.7@34.2,7.4
NetR10_8: R10.8 U2.17 | length 2.8
  Top Layer w0.203: U2.17 32.5,8.8 33.3,8 33.3,7.67 R10.8@33.47,7.5
NetR15_1: R15.1 U2.7 | length 2.8
  Top Layer w0.203: U2.7 33.15,17.073 33.7,17.623 R15.1@33.7,18.4
NetR15_2: R15.2 U2.6 | length 2.9
  Top Layer w0.203: U2.6 33.8,17.148 34.5,17.848 R15.2 R15.2@34.5,18.4
NetR15_3: R15.3 U2.5 | length 3
  Top Layer w0.203: U2.5 34.45,16.998 35.3,17.848 R15.3 R15.3@35.3,18.4
NetR15_4: R15.4 U2.4 | length 3
  Top Layer w0.203: U2.4 35.1,16.848 36.1,17.848 R15.4@36.1,18.4
NetR16_5: R16.5 U2.16 | length 2.9
  Top Layer w0.203: R16.5@31.85,7.45 31.7,7.3 31.7,8.5 31.85,8.65 U2.16
NetR16_6: R16.6 U2.15 | length 3
  Top Layer w0.203: R16.6@31.07,7.47 30.9,7.3 R16.6 30.9,8.4 31.2,8.7 U2.15
NetR16_7: R16.7 U2.14 | length 3
  Top Layer w0.203: R16.7@30.27,7.47 30.1,7.3 R16.7 30.1,8.3 30.55,8.75 U2.14
NetR16_8: R16.8 U2.13 | length 3.1
  Top Layer w0.203: R16.8@29.47,7.47 29.3,7.3 29.3,8.2 29.9,8.8 U2.13
NetR20_2: R20.2 U3.7 | length 3.4
  Top Layer w0.254: U3.7 51.421,1.778 R20.2
NetR24_2: R24.2 U5.9 | length 2.4
  Top Layer w0.2: U5.9 44.1,27.8 44.725,27.175
  Top Layer w0.254: 44.725,27.175 R24.2
RST: C5.2 P1.5 P2.18 R4.2 R19.1 U4.29 | length 84.7
  Top Layer w0.203: U4.29 25.9,26.975 R19.1 C5.2 27.725,25.946 35.333,25.946 39.7,30.313 39.7,32.711 40.389,33.4 54.2,33.4 v1(55.4,32.2) 55.575,32.2 R4.2
  Bottom Layer w0.203: P2.18 29.95,52.6 36.8,52.6 37.5,51.9 37.5,50.4 38.044,49.856 45.847,49.856 49.703,46 53.6,46 54.9,44.7 P1.5 55.34,32.26 v1(55.4,32.2)
RX: P2.8 S5.3 | length 27.6
  Top Layer w0.203: v1(38.4,48) S5.3
  Bottom Layer w0.203: P2.8 17.3,52.55 17.3,50.1 19.4,48 v1(38.4,48)
SCL: P2.5 P3.2 R23.1 U2.22 U4.28 U5.23 | length 103.5
  Top Layer w0.203: P3.2 16.58,25.82 18.895,25.82 R23.1 21.475,28.4 24.6,28.4 25.1,28.9 U4.28 ; U2.22 35.75,8.875 36.96,7.665 38.69,7.665 39.2,8.175 39.157,8.218 v1(39.082,8.218) ; v1(38.4,22.3) 38.4,26.503 39.253,27.356 40.506,27.356 U5.23
  Bottom Layer w0.203: P2.5 13.462,48.962 11.8,47.3 11.8,30.6 P3.2 14.4,22.31 22.41,14.3 24.81,11.9 36.675,11.9 39.1,9.475 39.1,8.5 v1@39.25,8.35 ; v1(38.4,22.3) 38.4,12 39.844,10.556 39.844,8.944 v1@39.25,8.35 ; v1(39.082,8.218) v1@39.118,8.218 ; v1@39.118,8.218 39.382,8.218 v1@39.25,8.35 ; v1@39.118,8.218 v1@39.25,8.35
SCLK: P1.3 P2.23 U4.17 | length 50.5
  Top Layer w0.203: U4.17 21.3,38.689 22.954,40.343 22.954,40.358 23.742,41.146 23.757,41.146 23.766,41.156 25.653,41.156 27.244,42.747 27.244,43.747 29.197,45.7 v1(31.2,45.7) ; P2.23 P2.23@36.7,50.93
  Bottom Layer w0.203: v1(31.2,45.7) 31.2,45.8 45.5,45.8 ; P2.23 36.322,50.978 38.3,49 42.3,49 45.5,45.8 ; P1.3 51.5,43.4 47.9,43.4 45.5,45.8
SDA: P2.3 P3.1 R22.1 U2.23 U4.27 U5.24 | length 102.8
  Top Layer w0.203: P3.1@11.494,28.168 13.205,29.88 18.895,29.88 R22.1 19.969,28.806 24.006,28.806 24.3,29.1 U4.27 ; U2.23 36.4,8.8 36.9,8.3 v1(38.1,8.3) ; v1(39.6,22.3) 38.921,22.979 38.921,26.521 39.4,27 U5.24
  Bottom Layer w0.203: P2.3 10.833,51.219 10.833,29.767 11.86,28.74 P3.1 12,27.86 12,24.025 24.481,11.544 36.456,11.544 38.1,9.9 v1(38.1,8.3) 38.8,7.6 38.802,7.6 38.837,7.565 39.363,7.565 39.398,7.6 39.4,7.6 40.2,8.4 40.2,11 39.2,12 39.6,12.4 v1(39.6,22.3)
SERVOA: SVA.3 U4.30 | length 25.4
  Top Layer w0.203: U4.30 26.7,28.8 27.381,28.119 32.019,28.119 32.6,28.7 v1(32.7,28.6)
  Bottom Layer w0.203: v1(32.7,28.6) 33,28.9 46.5,28.9 48.7,26.7 SVA.3
SERVOB: SVB.3 U4.31 | length 23.4
  Top Layer w0.254: U4.31 27.5,28.9 27.9,28.5 31,28.5 v1(31.8,29.3)
  Bottom Layer w0.254: v1(31.8,29.3) SVB.3
SGND: C9.1 C10.1 N1.2 R12.1 U1.2 | length 1.4
  Top Layer w0.203: C9.1 18.95,32.825 N1.2
TX: P2.10 S5.6 | length 37
  Top Layer w0.203: v1(38.4,42.5) S5.6
  Bottom Layer w0.203: P2.10 17.29,55.1 15.3,55.1 14.7,54.5 14.7,50.4 18.5,46.6 27.8,46.6 31.9,42.5 v1(38.4,42.5)
V_DIV: R8.1 R12.2 U4.19 | length 15.8
  Top Layer w0.152: 15.005,33.8 15.584,34.379 17.175,34.379 17.379,34.584 17.379,34.979 18.1,35.7
  Top Layer w0.203: R8.1 R12.2 9.525,33.125 10.2,33.8 15.005,33.8 ; 18.1,35.7 19.9,35.7 20.2,35.4 U4.19
VCC: C1.2 C3.2 P2.2 P2.4 SVA.2 SVB.2 U3.13 VR1.4 VR2.3 | length 85.8
  Top Layer w0.356: P2.2 8.478,53.848 9.7,52.626 ; C1.2 11.8,45.025 ; P2.4 9.7,52.626 ; VR1.4@13.1,45.002 13.077,45.025 11.8,45.025 ; C3.2 21.5,48.7 VR2.3 v1(21.5,45) ; 9.7,52.626 9.7,50.1 11.8,48 11.8,45.025
  Bottom Layer w0.356: VR1.4 25.896,45.004 32.3,38.6 49,38.6 51.8,35.8 51.8,29.5 SVB.2@52,29.3 ; SVB.2@51.84,29.3 51.84,26.72 SVA.2 52.1,26.46 51.9,26.26 51.9,18.458 U3.13
pads on no net: ENCA.- ENCB.- H1.- MOTORA.- MOTORB.- P2.1 P2.7 P2.11 P2.12 P2.13 P2.16 P2.22 P2.24 P2.26 P2.27 P2.28 P2.29 P2.31 P2.32 P2.33 P2.35 P2.36 P2.37 P2.38 P2.40 S1.3 S2.3 S3.3 S4.3 S6.2 S6.4 U3.8 U4.32 U5.0 U5.2 U5.3 U5.4 U5.5 U5.6 U5.7 U5.11 U5.12 U5.14 U5.15 U5.16 U5.17 U5.19 U5.21 U5.22

## Polygon pours and split planes (outlines as drawn)
SGND on Top Layer "Top-SGND" (solid, pour order 4): 4.22,36.7 22.52,36.7 22.52,30.2 4.22,30.2
GND on Top Layer "GND_L01_P005" (solid, remove dead copper, pour order 5): 0,3 0,18.5 0,37.5 0,53 cw(c3,53) 3,56 62,56 cw(c62,53) 65,53 65,3 cw(c62,3) 62,0 47,0 cw(c47,1) 46,1 46,19 ccw(c45,19) 44,19 44,1 cw(c43,1) 43,0 3,0 cw(c3,3)

## Keep-outs
Keep-Out Layer:
  circle w0.254: c3.5,52.5 r3
  circle w0.254: c61.5,52.5 r3
  circle w0.254: c61.5,3.5 r3.002
  circle w0.254: c3.5,3.5 r3.002
  lines w0.254: 0,0 43,0 ccw(c43,1) 44,1 44,19 cw(c45,19) 46,19 46,1 ccw(c47,1) 47,0 65,0 65,56 0,56 0,37.277 0,0

## Silkscreen, mask and mechanical layers (free items; w line width, h text height)
Top Overlay:
  text "UART" at 37.4,43.6 h1.52 r90
  text "PROGRAM" at 48,41.9 h1.52 r90
  text "<" at 0.4,23.6 h1.52 r270
  text "|" at 0.5,16.8 h1.52 r270
  text ">" at 0.4,10.5 h1.52 r270
  text "Penguin-Pi" at 13.7,3.8 h2
  text "For EGB439" at 13.3,1.7 h2
Mechanical 1:
  lines w0.254: 0,3 ccw(c3,3) 3,0 43,0 ccw(c43,1) 44,1 44,19 cw(c45,19) 46,19 46,1 ccw(c47,1) 47,0 62,0 ccw(c62,3) 65,3 65,53 ccw(c62,53) 62,56 3,56 ccw(c3,53) 0,53 0,37.5 0,3

## Text inside footprints (layer, text, board x,y; h text height)
P1: Top Overlay "1" at 48.736,44.446 h1.27 r90; Top Overlay "2" at 48.736,46.986 h1.27 r90